# EAGLE board avip-mod v1 (EAGLE 7.2.0)
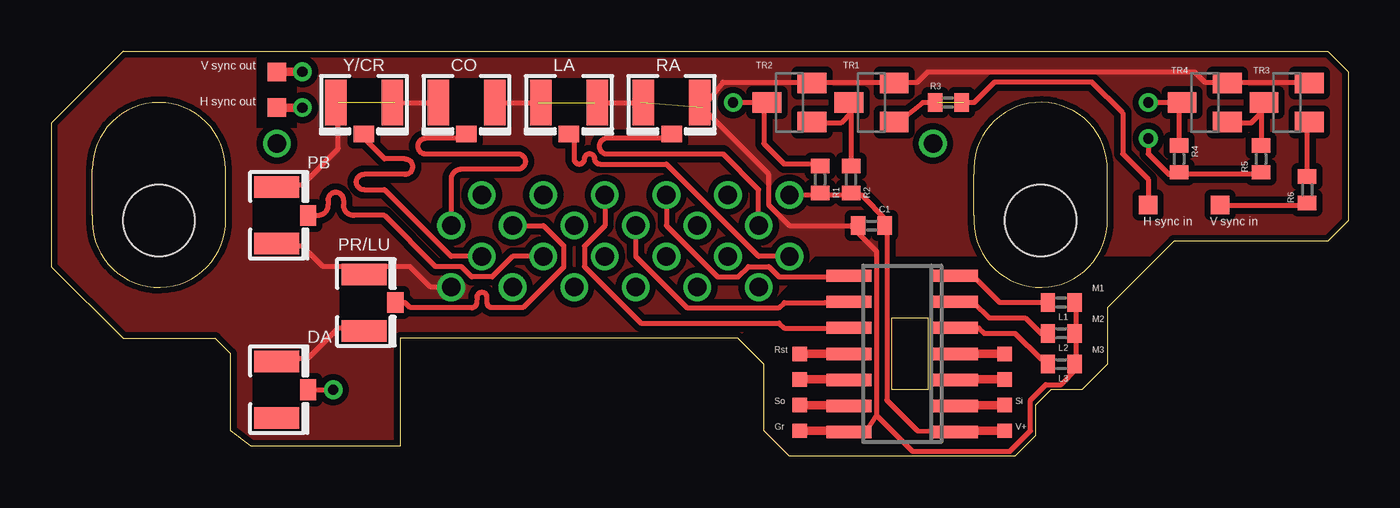
[diagram p0: board, top side]
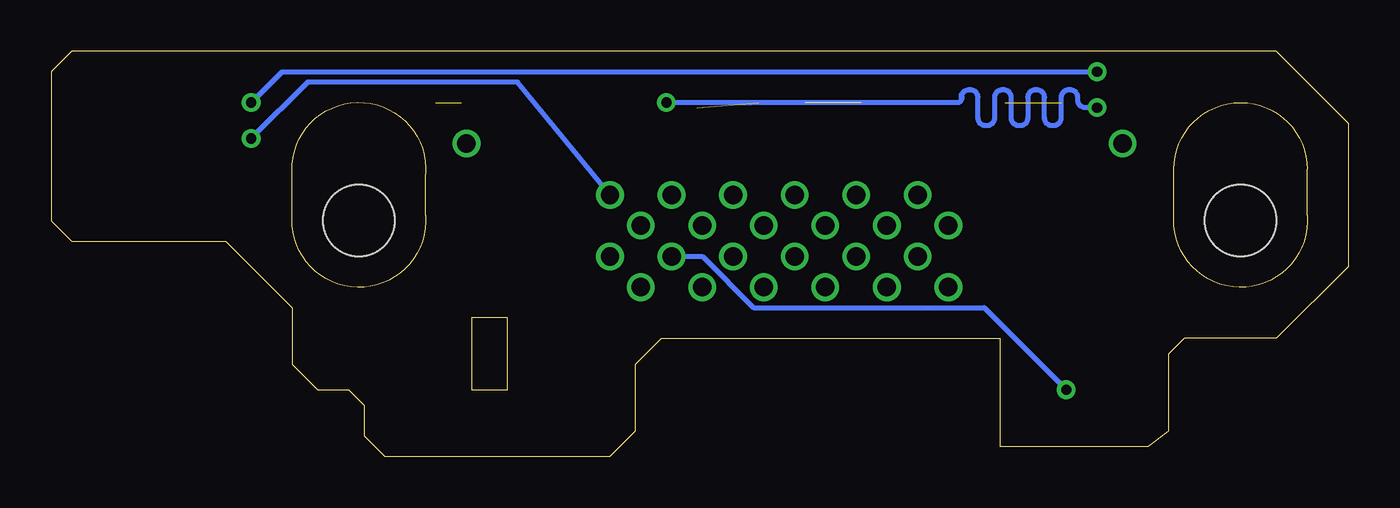
[diagram p1: board, bottom side, seen from below]

Size 63.25 x 19.75 mm. Coordinates in mm from the lower left corner, seen from the top.
Outline: 41,3.25 41,6.75 42.75,6.75 42.75,3.25 41,3.25
Outline: 8.5,14 arc180 2,14 2,11.75 arc180 8.5,11.25 8.5,14
Outline: 36,0 34.75,1.25 34.75,4.5 33.5,5.75 17,5.75 17,0.5 9.75,0.5 8.75,1.25 8.75,5 8,5.75 3.5,5.75 0,9.25 0,16.25 3.5,19.75 62.25,19.75 63.25,18.75 63.25,11.5 62.25,10.5 54.75,10.5 51.5,7.25 51.5,4.5 50.25,3.25 48.75,3.25 48,2.5 48,1 47,0 36,0
Outline: 51.5,14.25 arc180 45,13.75 45,11.75 arc180 51.5,11.25 51.5,14.25
Copper layers (1*16): Top 0.035mm / dielectric 1.5mm / Bottom 0.035mm
Design rules "default *": minimum track width 10mil, minimum drill 24mil, track to track 8mil, track to pad 8mil, pad to pad 8mil, via to via 8mil, smd to smd 8mil, copper to edge 8mil, drill to drill 8mil, minimum pad ring 10mil, minimum via ring 8mil, stop-mask expansion 4mil, vias tented up to drill 0mil, thermal gap 10mil
Net classes: 0 standard: width 0.25 mm; 1 video length: width 0.006 mm
Holes 3.5 mm at 5.25,11.5 48.25,11.5
tRestrict: area 2.2,8.5 to 8.2,17; area 45.2,8.5 to 51.2,17

## Footprints (pad centres in the part's own frame; a part is rotated, then mirrored left to right if it is on the bottom)
R0402 = smd 0.7 x 0.9: 1 -0.65,0; 2 0.65,0
U.FL = smd 2.2 x 1.05: 1 0,1.375; 2 0,-1.375 | smd 0.8 x 1: 3 1.525,0
TP07SQ = smd 0.7 x 0.7: TP 0,0
SO-14 = smd 0.6 x 2.2: 1 -3.81,-2.6; 2 -2.54,-2.6; 3 -1.27,-2.6; 4 0,-2.6; 5 1.27,-2.6; 6 2.54,-2.6; 7 3.81,-2.6; 8 3.81,2.6; 9 2.54,2.6; 10 1.27,2.6; 11 0,2.6; 12 -1.27,2.6; 13 -2.54,2.6; 14 -3.81,2.6
TP09SQ = smd 0.9 x 0.9: TP 0,0
SOT23-BCE = smd 1 x 1.4: B -0.95,-1.1; C 0.95,-1.1; E 0,1.1

## Placement (x,y rotation side)
C1  [R0402]  40,11.25 180 top
CO  [U.FL]  20.25,17.25 270 top
DA  [U.FL]  11,3.25 0 top
E$1  [TP07SQ]  36.5,5 0 top
E$2  [TP07SQ]  36.5,3.75 0 top
E$3  [TP07SQ]  36.5,2.5 0 top
E$4  [TP07SQ]  46.5,1.25 0 top
E$5  [TP07SQ]  36.5,1.25 0 top
E$6  [SO-14]  41.5,5 90 top
E$7  [TP09SQ]  53.5,12.25 180 top
E$8  [TP07SQ]  46.5,5 0 top
E$9  [TP07SQ]  46.5,3.75 0 top
E$10  [TP07SQ]  46.5,2.5 0 top
E$11  [TP09SQ]  11,17 180 top
E$14  [TP09SQ]  57,12.25 180 top
E$15  [TP09SQ]  11,18.75 180 top
L1  [R0402]  49.25,7.5 180 top
L2  [R0402]  49.25,6 0 top
L3  [R0402]  49.25,4.5 0 top
LA  [U.FL]  25.25,17.25 270 top
PB  [U.FL]  11,11.75 0 top
PR/LU  [U.FL]  15.25,7.5 0 top
R1  [R0402]  37.5,13.5 90 top
R2  [R0402]  39,13.5 270 top
R3  [R0402]  43.75,17.25 0 top
R4  [R0402]  55,14.5 270 top
R5  [R0402]  59,14.5 90 top
R6  [R0402]  61.25,13 90 top
RA  [U.FL]  30.25,17.25 270 top
TR1  [SOT23-BCE]  40,17.25 90 top
TR2  [SOT23-BCE]  36,17.25 90 top
TR3  [SOT23-BCE]  60.25,17.25 90 top
TR4  [SOT23-BCE]  56.25,17.25 90 top
Y/CR  [U.FL]  15.25,17.25 270 top

## Library data of the parts
C1 L1-L3 R1-R6 = eagle-ltspice
CO DA LA PB PR/LU RA Y/CR = adafruit
E$1-E$5 E$8-E$10 = testpad2
E$6 = microchip1
E$7 E$11 E$14 E$15 = testpad1
TR1-TR4 = ref-packages

## Nets
H_SYNC_IN: E$7.TP
H_SYNC_OUT: E$11.TP
V_SYNC_OUT: E$15.TP
VCC: E$6.1

## Tracks (layer width: path | path; a pad name or v marks a point on that pad's centre or on a via)
AUDIO_LEFT_OUTPUT  (via drill 0.9 pad 0.81)
  Top 0.254: v36,9.75 34.5,9.75 30,14.25 26.75,14.25 arc-90 26.5,14.5 arc90 26.25,14.75 arc90 26,14.5 arc-90 25.75,14.25 arc-90 25.5,14.5 25.5,15.75
AUDIO_LEFT_OUTPUT_GROUND  (via drill 0.9 pad 0.81)
  other vias: 33,12.75
AUDIO_RIGHT_OUTPUT  (via drill 0.9 pad 0.81)
  Top 0.254: v34.5,11.25 34.5,13 32.75,14.75 27,14.75 arc-143 27,15.5 30.25,15.5
AUDIO_RIGHT_OUTPUT_GROUND  (via drill 0.9 pad 0.25)
  other vias: 34.5,8.25
COMPONENT_PB_GROUND  (via drill 0.9 pad 0.81)
  other vias: 25.5,8.25
COMPONENT_PB_OUTPUT  (via drill 0.9 pad 0.81)
  Top 0.254: v24,9.75 22.5,9.75 21.5,8.75 20.5,8.75 20,9.25 18.75,9.25 16.25,11.75 14.75,11.75 arc-90 14.25,12.25 14.25,12.5 arc180 13.5,12.5 13.5,12.25 arc-90 13,11.75 12.75,11.75
COMPONENT_PR_GROUND  (via drill 0.9 pad 0.81)
  other vias: 24,12.75
COMPONENT_PR_OUTPUT  (via drill 0.9 pad 0.81)  (1 unrouted)
  Top 0.254: v22.5,11.25 24,11.25 25,10.25 25,9.25 23,7.25 21.5,7.25 arc-90 21.25,7.5 21.25,7.75 arc90 21,8 arc90 20.75,7.75 20.75,7.5 arc-91 20.5,7.25 | 20.5,7.25 17.5,7.25 17.25,7.5 16.75,7.5
COMPONENT_Y_GROUND  (via drill 0.9 pad 0.81)
  other vias: 22.5,8.25
COMPONENT_Y_OUTPUT  (via drill 0.9 pad 0.81)
  Top 0.254: v21,9.75 19.5,9.75 16.25,13 15.25,13 arc-180 15.25,13.75 17.25,13.75 arc180 17.25,14.5 16.25,14.5 15.25,15.5
COMPOSITE_GROUND  (via drill 0.9 pad 0.81)
  other vias: 21,12.75
COMPOSITE_OUTPUT  (via drill 0.9 pad 0.81)
  Top 0.254: 20,15.5 18.25,15.5 arc180 18.25,14.75 22.75,14.75 arc-180 22.75,14 20,14 arc90 19.5,13.5 v19.5,11.25
DIGITAL_AUDIO_OUTPUT  (via drill 0.5)
  Top 0.254: 12.5,3.25 v13.75,3.25
  Bottom 0.254: v13.75,3.25 17.75,7.25 29,7.25 31.5,9.75 33,9.75
GROUND  (via drill 0.9 pad 0.81)  (3 unrouted)
  Top 0.254: 61.25,18.25 56.25,18.25 55.75,18.75 42.75,18.75 42.25,18.25 32.75,18.25 31.75,17 35,13.75 35,12.25 36,11.25 39,11.25 40.25,10 40.25,2 | 40.25,2 42,0.25 46.75,0.25 47.75,1.25 47.75,2.75 48.5,3.5 49.25,3.5 50,4.25 50,7.5 | 40.25,2 39.75,1.25 38.75,1.25 | 16.75,17.25 18.5,17.25 | 22,17.25 23.75,17.25 | 26.5,17.25 28.75,17.25 | 14,17.25 14,15 12.25,13.25 10.75,13.25 | v19.5,8.25 18.5,8.25 17.5,9.25 13.25,9.25 12.25,10.25 10.25,10.25 | 15,6.25 14,6.25 12.5,4.75 11.25,4.75
  pour Top (isolate 0.305): 0,16.25 0,9.25 3.5,5.75 8,5.75 8.75,5 8.75,1.25 9.75,0.5 17,0.5 17,5.75 33.5,5.75 37.25,9.75 54,9.75 54.75,10.5 62.25,10.5 63.25,11.5 63.25,18.75 62.25,19.75 12,19.75 12,16 10,16 10,19.75 3.5,19.75
H_SYNC_IN  (1 unrouted)
  Top 0.254: E$7.TP 53.5,13.5 52.25,14.75 52.25,16.75 50.75,18.25 46,18.25 45,17.25 44.5,17.25 | 43.25,17.25 42.5,17.25
H_SYNC_OUT  (via drill 0.5 pad 0.25)
  Top 0.254: 34.5,17.25 v33.25,17.25
  Top 0.406: v12.25,17 E$11.TP
  Bottom 0.254: v12.25,17 12.81,17 arc90 13.19,17.38 13.19,17.5 arc-90 13.57,17.88 13.62,17.88 arc-90 14,17.5 14,16.5 arc90 14.38,16.12 14.43,16.12 arc90 14.81,16.5 14.81,17.5 arc-90 15.2,17.88 15.24,17.88 arc-90 15.62,17.5 15.62,16.5 arc90 16.01,16.12 16.05,16.12 arc90 16.44,16.5 16.44,17.5 arc-90 16.82,17.88 16.87,17.88 arc-90 17.25,17.5 17.25,16.5 arc90 17.63,16.12 17.68,16.12 arc90 18.06,16.5 18.06,17.5 arc-90 18.44,17.88 18.49,17.88 arc-90 18.87,17.5 18.87,17.63 arc90 19,17.25 v33.25,17.25
MODE_1  (via drill 0.9 pad 0.81)
  Top 0.254: v30,12.75 30,11.25 32.5,8.75 33.5,8.75 34,9.25 35,9.25 35.5,8.75 38,8.75
MODE_1_GROUND  (via drill 0.9 pad 0.81)
  other vias: 30,9.75
MODE_2  (via drill 0.9 pad 0.81)
  Top 0.254: v28.5,11.25 28.5,9.75 31,7.25 35.5,7.25 35.75,7.5 37.75,7.5
MODE_2_GROUND  (via drill 0.9 pad 0.81)
  other vias: 28.5,8.25
MODE_3  (via drill 0.9 pad 0.81)
  Top 0.254: v27,12.75 27,11.25 26,10.25 26,9.25 28.75,6.5 35.5,6.5 35.75,6.25 38,6.25
MODE_3_GROUND  (via drill 0.9 pad 0.81)
  other vias: 27,9.75
S$1
  Top 0.254: 48.5,7.5 46.25,7.5 45,8.75 44.25,8.75
S$2  (via drill 0.9)
  other vias: 43,15.25
S$3
  Top 0.406: 44.25,1.25 46.25,1.25
S$4
  Top 0.254: 41.25,16.25 42.5,17.25
S$6
  Top 0.254: 45,7.5 45.75,6.75 47.5,6.75 48.25,6
S$7
  Top 0.254: 48.25,4.75 47,6 45.5,6 45.25,6.25 44.5,6.25
S$8  (via drill 0.9)
  other vias: 11,15.25
S$9
  Top 0.254: 12.5,11.75 12.75,11.5
S$13
  Top 0.406: 44.5,3.75 46.25,3.75
S$14
  Top 0.406: 44,2.5 46.25,2.5
S$15
  Top 0.406: 38.5,2.5 36.5,2.5
S$16
  Top 0.406: 44,5 46.25,5
S$17  (via drill 0.9 pad 0.81)
  other vias: 31.5,11.25
S$18  (via drill 0.9 pad 0.81)
  other vias: 33,9.75
S$19  (via drill 0.9 pad 0.81)
  other vias: 25.5,11.25
S$20
  Top 0.406: 36.5,1.25 37.75,1.25
S$21
  Top 0.406: 36.5,3.75 38,3.75
S$23
  Top 0.254: 39,17.25 39,16.75 | 39,16.75 38.5,16.25 37.5,16.25 | 39,16.75 39,14.25
S$24
  Top 0.254: 34.75,17.25 34.75,15.25 35.75,14.25 37.5,14.25
S$25
  Top 0.406: 36.5,5 37.75,5
S$29  (via drill 0.9 pad 0.81)
  other vias: 31.5,8.25
S$30
  Top 0.254: 61.25,13.5 61.25,16.25
S$31
  Top 0.254: 59,17.25 59,16.75 | 59,16.75 58.5,16.25 57,16.25 | 59,16.75 59,15
S$32
  Top 0.254: 55,17.25 55,15.5
S$36
  Top 0.254: 54.75,17.25 53.25,17.25
V_SYNC_IN
  Top 0.254: 57,12.25 61.25,12.25
V_SYNC_OUT  (via drill 0.5 pad 0.25)
  Top 0.406: v12.25,18.75 E$15.TP
  Bottom 0.254: v53.5,17.25 52,18.75 v12.25,18.75
VCC  (via drill 0.5, 0.9 pad 0.81)
  Top 0.254: v36,12.75 39.5,12.75 40.75,11.5 40.75,2.75 42.25,1.25 E$6.1 | 59,13.75 54.5,13.75 53.5,14.75 v53.5,15.5
  Bottom 0.254: v36,12.75 40.5,18.25 50.75,18.25 v53.5,15.5

## Text on the board
tNames: V sync out | H sync out | H sync in | V sync in | M1 | M2 | Rst | M3 | So | Si | Gr | V+